# Altium PCB MYPCB.PcbDoc
Units mil, origin at the board's own origin, x right, y up, seen from the top; angles counter-clockwise.
Board outline 6000 x 4000 mil, 2 copper layers (Top Layer, Bottom Layer); 56 components, 75 nets, 228 pads, 42 vias.
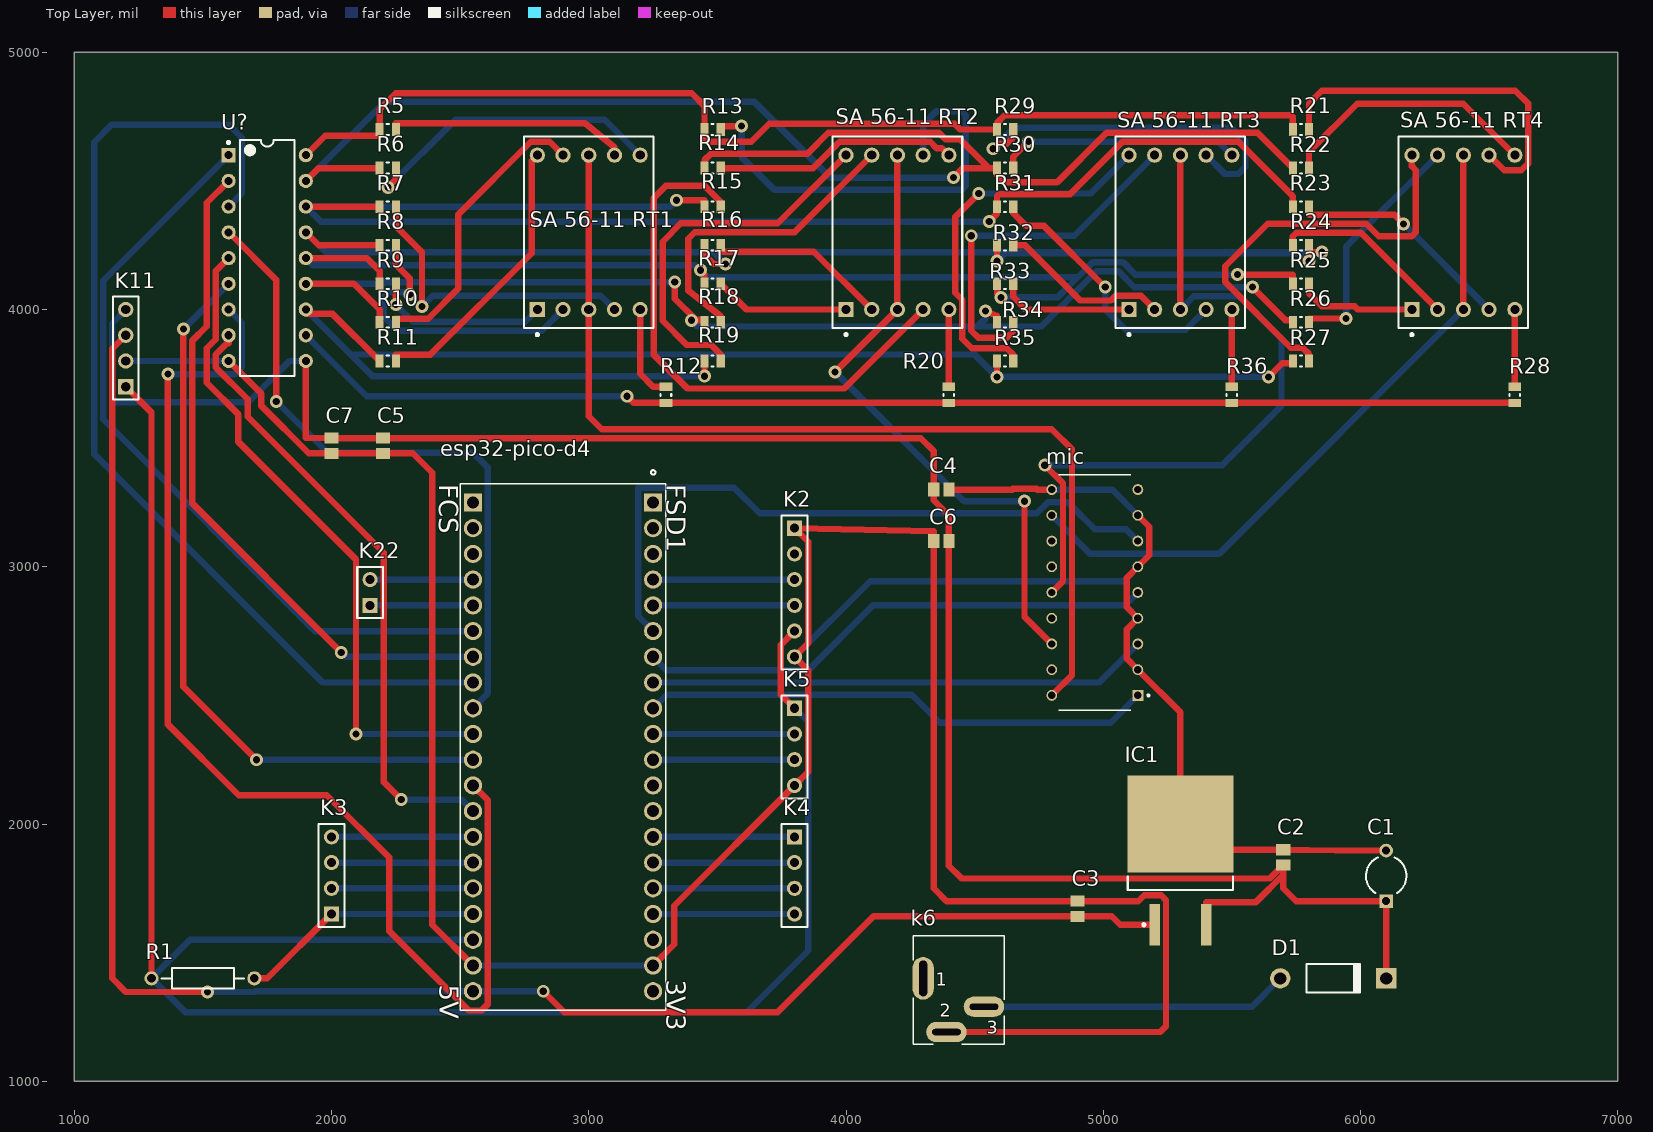
[diagram p0: Top Layer view]
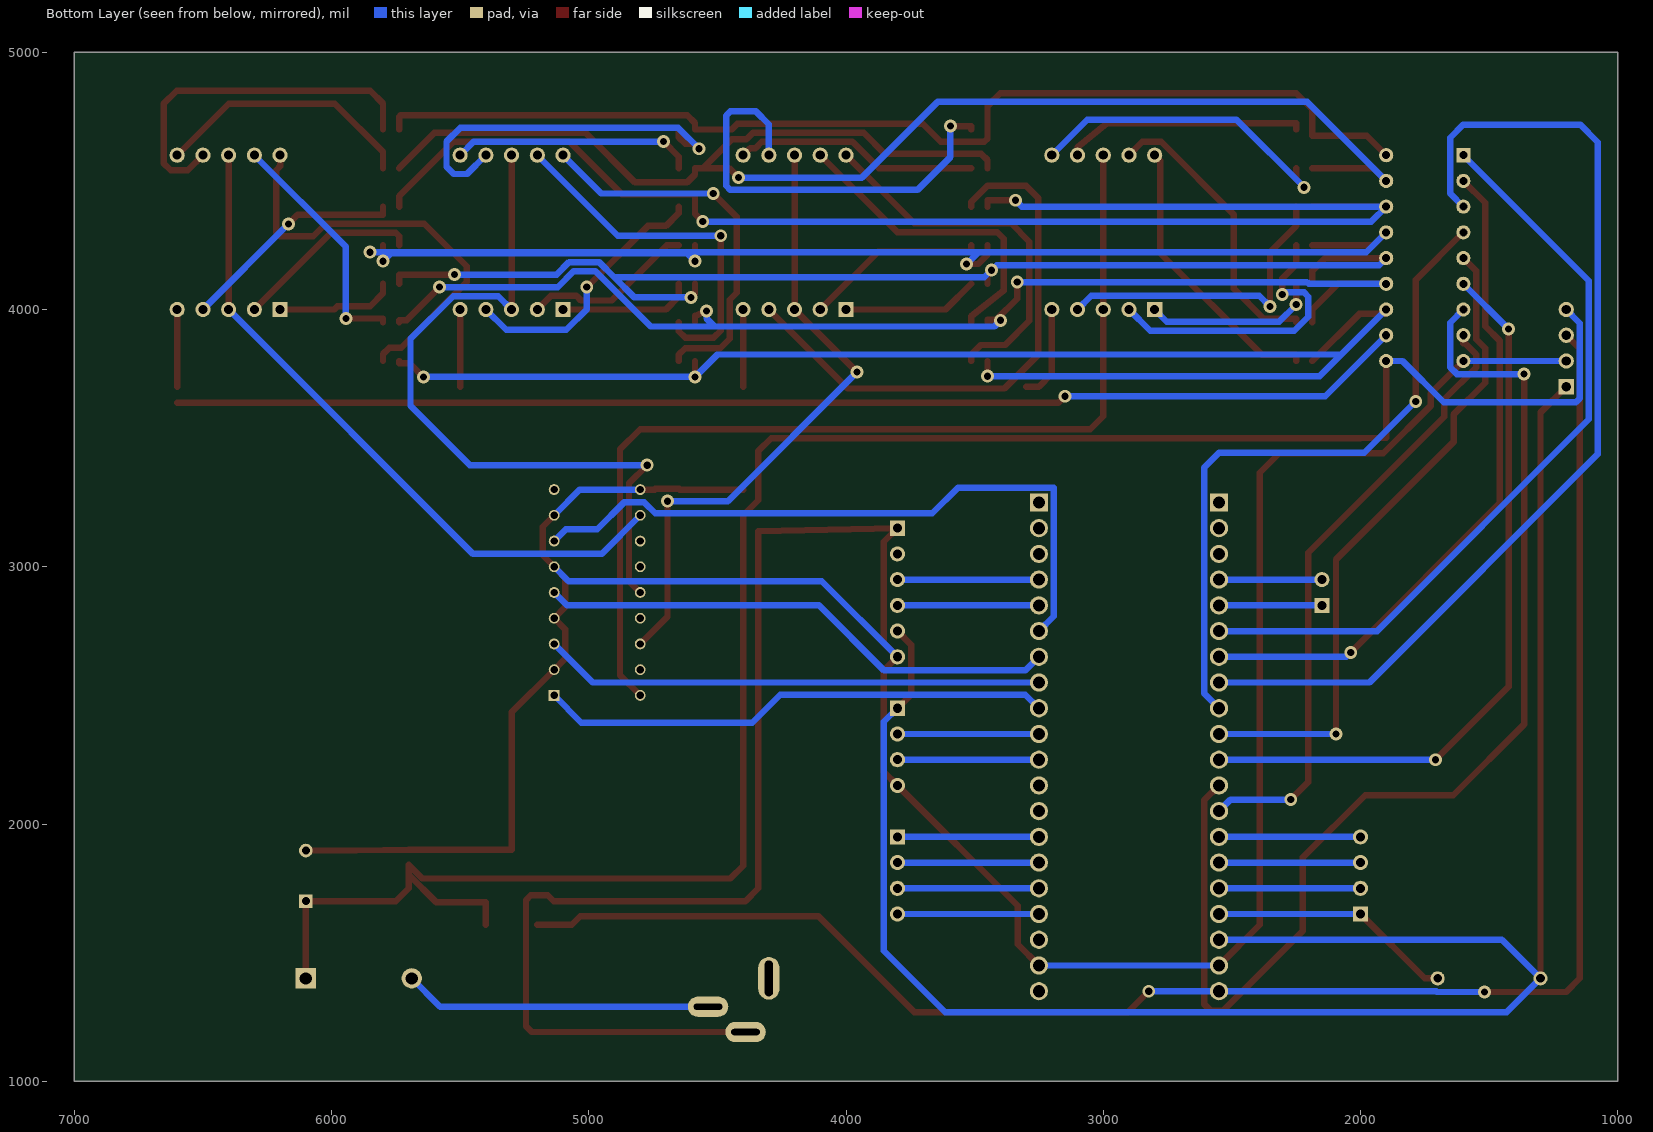
[diagram p1: Bottom Layer view, seen from below]

## Layer stack, top to bottom
Top Solder: solder mask 0.4, Solder Resist, Dk 3.5
Top Layer: signal copper 1.4
Dielectric 1: dielectric 12.6, FR-4, Dk 4.8
Bottom Layer: signal copper 1.4
Bottom Solder: solder mask 0.4, Solder Resist, Dk 3.5

## Board outline
1000,1000 7000,1000 7000,5000 1000,5000

## Design rules (kind name [scope] priority, off if disabled: settings)
Clearance [All] p1: gap=10 ignorepadtopadclearanceinfootprint=FALSE except(0: Arc-Hole Track-Hole SMDPad-Hole THPad-Hole Via-Hole Fill-Hole Poly-Hole Region-Hole Text-Hole)
PolygonConnect [All] p1: connectstyle=Relief reliefconductorwidth=10 reliefentries=4 polygonreliefangle="90 Angle" airgapwidth=10
RoutingVias [All] p1: holewidth=28 width=50 viastyle="Through Hole" minholewidth=28 minwidth=50 maxholewidth=28 maxwidth=50
SolderMaskExpansion [All] p1: expansion=4 istentingtop=FALSE
Width [All] p1: maxlimit=50 minlimit=15 preferedwidth=25 minimp=50.000000 maximp=50.000000 favimp=50.000000
30 further rules are at their usual default settings.

## Components (designator, comment, footprint, x,y, rotation, side; value= is the part's Value field where it differs from the comment)
C1 "Cap Pol1" CAPR5-4X5 6100,1798.42 r90 top value=100μF
C2 "Cap Pol3" C0805 5700,1870.47 r90 top value=330nF
C3 "Cap Pol3" C0805 4900,1670.47 r90 top value=100nF
C4 "Cap Pol3" C0805 4370.47,3300 r0 top value=1μF
C5 "Cap Pol3" C0805 2200,3470.47 r270 top value=1μ
C6 "Cap Pol3" C0805 4370.47,3100 r180 top value=100nF
C7 "Cap Pol3" C0805 2000,3470.47 r270 top value=100nF
D1 "Diode" DO-41 5894.09,1400 r0 top
esp32-pico-d4 "esp32-pico-d4" esp32picod4 2880,2305 r270 top
IC1 "L7805CD2T-TR" TO-263_M 5300,1858.27 r90 top
K2 "Header 6" HDR1X6 3800,3150 r270 top
K3 "Header 4" HDR1X4 2000,1650 r90 top
K4 "Header 4" HDR1X4 3800,1950 r270 top
K5 "Header 4" HDR1X4 3800,2450 r270 top
k6 "k6" k6 4442.8,1355 r0 top
K11 "Header 4" HDR1X4 1200,3700 r90 top
K22 "Header 2" HDR1X2 2150,2850 r90 top
mic "MIC2981" MIC2981 4964.65,2915 r180 top
R1 "Res2" AXIAL-0.4 1500,1400 r0 top value=1K
R5 "Res2" smd43 2218.5,4700 r0 top value=43Ω
R6 "Res2" smd43 2218.5,4550 r0 top value=43Ω
R7 "Res2" smd43 2218.5,4400 r0 top value=43Ω
R8 "Res2" smd43 2218.5,4250 r0 top value=43Ω
R9 "Res2" smd43 2218.5,4100 r0 top value=43Ω
R10 "Res2" smd43 2218.5,3950 r0 top value=43Ω
R11 "Res2" smd43 2218.5,3800 r0 top value=43Ω
R12 "Res2" smd43 3300,3668.5 r90 top value=680Ω
R13 "Res2" smd43 3481.5,4700 r0 top value=43Ω
R14 "Res2" smd43 3481.5,4550 r0 top value=43Ω
R15 "Res2" smd43 3481.5,4400 r0 top value=43Ω
R16 "Res2" smd43 3481.5,4250 r0 top value=43Ω
R17 "Res2" smd43 3481.5,4100 r0 top value=43Ω
R18 "Res2" smd43 3481.5,3950 r0 top value=43Ω
R19 "Res2" smd43 3481.5,3800 r0 top value=43Ω
R20 "Res2" smd43 4400,3668.5 r90 top value=680Ω
R21 "Res2" smd43 5768.5,4700 r0 top value=43Ω
R22 "Res2" smd43 5768.5,4550 r0 top value=43Ω
R23 "Res2" smd43 5768.5,4400 r0 top value=43Ω
R24 "Res2" smd43 5768.5,4250 r180 top value=43Ω
R25 "Res2" smd43 5768.5,4100 r0 top value=43Ω
R26 "Res2" smd43 5768.5,3950 r0 top value=43Ω
R27 "Res2" smd43 5768.5,3800 r0 top value=43Ω
R28 "Res2" smd43 6600,3668.5 r90 top value=680Ω
R29 "Res2" smd43 4618.5,4700 r0 top value=43Ω
R30 "Res2" smd43 4618.5,4550 r0 top value=43Ω
R31 "Res2" smd43 4618.5,4400 r0 top value=43Ω
R32 "Res2" smd43 4618.5,4250 r0 top value=43Ω
R33 "Res2" smd43 4618.5,4100 r0 top value=43Ω
R34 "Res2" smd43 4618.5,3950 r0 top value=43Ω
R35 "Res2" smd43 4618.5,3800 r0 top value=43Ω
R36 "Res2" smd43 5500,3668.5 r90 top value=680Ω
"SA 56-11 RT1" "Dpy Blue-CA" H 3000,4300 r0 top
"SA 56-11 RT2" "Dpy Blue-CA" H 4200,4300 r0 top
"SA 56-11 RT3" "Dpy Blue-CA" H 5300,4300 r0 top
"SA 56-11 RT4" "Dpy Blue-CA" H 6400,4300 r0 top
U? "ULN2803A" STM-DIP-18 1750,4200 r0 top

## Footprints (in the part's own frame and the unit in brackets; to place one, negate y for a bottom-side part, rotate by r counter-clockwise, add the part's x,y. Pads: shape width x height; smd on the part's side, far side on the other; paste and mask are expansions set on the pad)
AXIAL-0.4 [mm] "Axial Device, Thru-Hole; 2 Leads; 0.4 in Pin Spacing"
  round 1.4 hole 0.85: 1(-5.08,0) 2(5.08,0)
  silkscreen extent -4.06,-1.02 4.06,1.02
C0805 [mm] "Chip Capacitor, Body 2.0x1.3mm, IPC High Density"
  rect 1.1x1.4 smd: 1(-0.75,0) 2(0.75,0)
  body extent -1.1,-0.72 1.1,0.72, height 1.4
CAPR5-4X5 [mm] "Capacitor; 2 Leads"
  rect 1.35x1.35 hole 0.8: 1(-2.5,0)
  round 1.35 hole 0.8: 2(2.5,0)
  silkscreen extent -1.69,-2 1.82,2
DO-41 [mm] "Diode, Axial; Body 5.2 x 2.7 mm (LxDia. max), Lead Dia. 0.86 mm (max)"
  round 2 hole 1.2: 1(-5.23,0)
  rect 2x2 hole 1.2: 2(5.23,0)
  silkscreen extent -2.65,-1.4 2.75,1.4
esp32picod4 [mm]
  rect 1.8x1.8 hole 1.2: 1(-24.003,-8.382) 40(-24.003,9.398)
  round 1.8 hole 1.2: 2(-21.463,-8.382) 3(-18.923,-8.382) 4(-16.383,-8.382) 5(-13.843,-8.382) 6(-11.303,-8.382) 7(-8.763,-8.382) 8(-6.223,-8.382) 9(-3.683,-8.382) 10(-1.143,-8.382) 11(1.397,-8.382) 12(3.937,-8.382) 13(6.477,-8.382) 14(9.017,-8.382) 15(11.557,-8.382) 16(14.097,-8.382) 17(16.637,-8.382) 18(19.177,-8.382) 19(21.717,-8.382) 20(24.257,-8.382) 21(24.257,9.398) 22(21.717,9.398) 23(19.177,9.398) 24(16.637,9.398) 25(14.097,9.398) 26(11.557,9.398) 27(9.017,9.398) 28(6.477,9.398) 29(3.937,9.398) 30(1.397,9.398) 31(-1.143,9.398) 32(-3.683,9.398) 33(-6.223,9.398) 34(-8.763,9.398) 35(-11.303,9.398) 36(-13.843,9.398) 37(-16.383,9.398) 38(-18.923,9.398) 39(-21.463,9.398)
  silkscreen extent -27.2,-9.64 26.13,10.66
H [mm] "LED, 7-Segment Display, 14.2 mm, RHD; 10 Leads; Row Space 15.24 mm; Pitch 2.54 mm"
  rect 1.5x1.5 hole 0.9: 1(-5.08,-7.62)
  round 1.5 hole 0.9: 2(-2.54,-7.62) 3(0,-7.62) 4(2.54,-7.62) 5(5.08,-7.62) 6(5.08,7.62) 7(2.54,7.62) 8(0,7.62) 9(-2.54,7.62) 10(-5.08,7.62)
  silkscreen extent -6.4,-10.22 6.4,9.45, body extent -6.4,-9.45 6.4,9.45, height 8.25
HDR1X2 [mm] "Connector; Header; 2 Position"
  rect 1.5x1.5 hole 0.9: 1(0,0)
  round 1.5 hole 0.9: 2(2.54,0)
  silkscreen extent -1.27,-1.27 3.81,1.27
HDR1X4 [mm] "Connector; Header; 4 Position"
  rect 1.5x1.5 hole 0.9: 1(0,0)
  round 1.5 hole 0.9: 2(2.54,0) 3(5.08,0) 4(7.62,0)
  silkscreen extent -1.27,-1.27 8.89,1.27
HDR1X6 [mm] "Connector; Header; 6 Position"
  rect 1.5x1.5 hole 0.9: 1(0,0)
  round 1.5 hole 0.9: 2(2.54,0) 3(5.08,0) 4(7.62,0) 5(10.16,0) 6(12.7,0)
  silkscreen extent -1.27,-1.27 13.97,1.27
k6 [mm]
  oval 2.1x4.2 hole 0.8 slot 3.52 at 90 deg: 1(-3.627,1.143)
  oval 4x2 hole 0.6 slot 2.82 at 0 deg: 2(-1.327,-4.157) 3(2.373,-1.657)
  silkscreen extent -4.63,-5.36 4.37,5.34
MIC2981 [mm]
  rect 1.07x1.07 hole 0.72: 1(-4.318,10.541)
  round 1.07 hole 0.72: 2(-4.318,8.001) 3(-4.318,5.461) 4(-4.318,2.921) 5(-4.318,0.381) 6(-4.318,-2.159) 7(-4.318,-4.699) 8(-4.318,-7.239) 9(-4.318,-9.779) 10(4.182,-9.779) 11(4.182,-7.239) 12(4.182,-4.699) 13(4.182,-2.159) 14(4.182,0.381) 15(4.182,2.921) 16(4.182,5.461) 17(4.182,8.001) 18(4.182,10.541)
  silkscreen extent -5.45,-11.24 3.48,12
smd43 [mm]
  rect 0.8x1.25 smd: 1(-0.8,0) 2(0.8,0)
  silkscreen extent -0.1,-0.53 0.1,0.53, body extent -1.05,-0.67 1.05,0.67, height 0.6
STM-DIP-18 [mm] "DIP, 18-Leads, Body 23.25x7.1mm, Pitch 2.54mm"
  rect 1.4x1.4 hole 0.8: 1(-3.81,10.16)
  round 1.4 hole 0.8: 2(-3.81,7.62) 3(-3.81,5.08) 4(-3.81,2.54) 5(-3.81,0) 6(-3.81,-2.54) 7(-3.81,-5.08) 8(-3.81,-7.62) 9(-3.81,-10.16) 10(3.81,-10.16) 11(3.81,-7.62) 12(3.81,-5.08) 13(3.81,-2.54) 14(3.81,0) 15(3.81,2.54) 16(3.81,5.08) 17(3.81,7.62) 18(3.81,10.16)
  silkscreen extent -3.93,-11.65 2.7,11.65, body extent -3.93,-11.63 3.93,11.63, height 3.93
TO-263_M [mm] "D2-PAK, 4-Leads, Body 9.2x10.2mm, Pitch 2.54mm, Lead Span 15.4mm, IPC Low Density"
  rect 4.1x1.05 smd: 1(-6.35,2.54) 3(-6.35,-2.54)
  rect 9.6x10.45 smd: 4(3.6,0)
  silkscreen extent -6.47,-5.2 -1.6,5.2, body extent -2.9,-5.2 6.45,5.2, height 4.6

## Part data
C1: "Polarized Capacitor (Radial)", LatestRevisionDate=17-Jul-2002, LatestRevisionNote="Re-released for DXP Platform.", PackageDescription="Polarized Capacitor (Radial); 2 Leads", PackageReference=RB7.6-15, Published=8-Jun-2000, Publisher="Altium Limited"
C2 C3 C4 C5 C6 C7: "Polarized Capacitor (Surface Mount)", LatestRevisionDate=29-May-2009, LatestRevisionNote="IPC-7351 Footprint Added.", PackageDescription="Chip Capacitor", PackageReference=C0805, Published=8-Jun-2000, Publisher="Altium Limited"
D1: library part "Diode 1N4002", "1 Amp General Purpose Rectifier", Code_JEDEC=DO-204-AL, ComponentLink1Description="Manufacturer Link", ComponentLink1URL=http://www.fairchildsemi.com/, ComponentLink2Description=Datasheet, ComponentLink2URL=http://www.fairchildsemi.com/ds/1N%2F1N4001.pdf, DatasheetVersion=1998, LatestRevisionDate=17-Jul-2002, LatestRevisionNote="Re-released for DXP Platform.", PackageDescription="Diode, Axial; Body 5.2 x 2.7 mm (LxDia. max), Lead Dia. 0.86 mm (max)", PackageReference=DO-41, PackageVersion=Aug-1999, Published=8-Jun-2000, Publisher="Altium Limited"
esp32-pico-d4: library part "picoESP32-PICO-KIT V"
IC1: library part CMP-0244-00213-1, "Positive Voltage Regulator, 3-Pin D2PAK, Tape and Reel", ComponentLink1Description="Manufacturer URL", ComponentLink1URL=http://www.st.com, ComponentLink2Description=Datasheet, ComponentLink2URL=http://www.st.com/internet/com/TECHNICAL_RESOURCES/TECHNICAL_LITERATURE/DATASHEET/CD00000444.pdf, DatasheetVersion=16/11/2011, PackageDescription="3-Pin Transistor Outline Package 2.54 mm Pitch, 15.4 mm Lead Span (D2PAK)", PackageReference=TO-263, PackageVersion=2011
K2: "Header, 6-Pin", LatestRevisionDate=17-Jul-2002, LatestRevisionNote="Re-released for DXP Platform.", Publisher="Altium Limited"
K3 K4 K5 K11: "Header, 4-Pin", LatestRevisionDate=17-Jul-2002, LatestRevisionNote="Re-released for DXP Platform.", Publisher="Altium Limited"
K22: "Header, 2-Pin", LatestRevisionDate=17-Jul-2002, LatestRevisionNote="Re-released for DXP Platform.", Publisher="Altium Limited"
R1 R5 R6 R7 R8 R9 R10 R11 R12 R13 R14 R15 R16 R17 R18 R19 R20 R21 R22 R23 R24 R25 R26 R27 R28 R29 R30 R31 R32 R33 R34 R35 R36: "Resistor", LatestRevisionDate=17-Jul-2002, LatestRevisionNote="Re-released for DXP Platform.", PackageDescription="Axial Device, Thru-Hole; 2 Leads; 0.4 in Pin Spacing", PackageReference=AXIAL-0.4, Published=8-Jun-2000, Publisher="Altium Limited"
"SA 56-11 RT1": "14.2 mm General Purpose Blue 7-Segment Display: CA, RH DP, Gray Surface", Colour=Blue, ComponentLink1Description="Manufacturer Link", ComponentLink1URL=http://www.agilent.com/, DatasheetVersion=24-Sep-2002, LatestRevisionDate=17-Dec-2003, LatestRevisionNote="Schematic revised, PCB Footprint replaced.", MinimumIntensity="2020 ucd", Note="IF = 10 mA", PackageDescription="LED, 7-Segment Display, 14.2 mm, RHD; 10 Leads; Row Space 15.24 mm; Pitch 2.54 mm", PackageReference=H, PackageVersion=24-Sep-2002, Published=8-Jun-2000, Publisher="Altium Limited"
"SA 56-11 RT2" "SA 56-11 RT3" "SA 56-11 RT4": "14.2 mm General Purpose Blue 7-Segment Display: CA, RH DP, Gray Surface", Colour=red, ComponentLink1Description="Manufacturer Link", ComponentLink1URL=http://www.agilent.com/, DatasheetVersion=24-Sep-2002, LatestRevisionDate=17-Dec-2003, LatestRevisionNote="Schematic revised, PCB Footprint replaced.", MinimumIntensity="2020 ucd", Note="IF = 10 mA", PackageDescription="LED, 7-Segment Display, 14.2 mm, RHD; 10 Leads; Row Space 15.24 mm; Pitch 2.54 mm", PackageReference=H, PackageVersion=24-Sep-2002, Published=8-Jun-2000, Publisher="Altium Limited"
U?: library part CMP-2000-05363-1, "Eight Darlington Arrays, 50 V, 2.25 W, 500 mA, 18-Pin DIP, RoHS, Tube", Collector Emitter Voltage V(br)ceo=50V, DC Collector Current=500mA, DC Current Gain hFE=1000hFE, Manufacturer=STMicroelectronics, Operating Temperature Max=85degC, Package Description="18-Pin Double In-line Package, Body 24.8 x 7.1 mm, Pitch 2.54 mm", Package Reference=DIP-18, Power Dissipation Pd=2.25W, Transistor Case Style=DIP, Automotive Qualification Standard=-, Datasheet URL=https://datasheet.ciiva.com/29306/171824-da-01-en-ic-uln2803-dil18-29306026.pdf, Datasheet Version=Sep-03, Manufacturer URL=http://www.st.com/, MSL=-, No. of Pins=18Pins, Product Range=-, SVHC=NoSVHC(17-Dec-2015), Transistor Polarity=NPN

## Via types
v1: diameter 50, hole 28, Top Layer to Bottom Layer, 42 vias

## Nets (pads, with @x,y where several pads share a name; then routed paths per layer and width w, separated by ;. In a path a pad name is that pad's centre, name@x,y a point inside that pad or via, vN(x,y) a via of type N, cw(c..) or ccw(c..) an arc to the next point about the centre after c; other vN are vias at no path point)
+3.3: esp32-pico-d4.18 K2.5 K5.1 K11.1 R1.1 | length 7669.1
  Top Layer w25: K11.1 1300,3600 R1.1 ; K5.1 3747,2503 3747,2697 K2.5
  Bottom Layer w25: esp32-pico-d4.18 1450,1550 R1.1 1432,1268 3614,1268 3853,1507 3853,2397 K5.1
+5: C3.1 esp32-pico-d4.20 IC1.1 K11.3 | length 6800.1
  Top Layer w25: K11.3 1147,3847 1147,1400 1200,1347 v1(1518,1347) ; v1(2823,1350) 2905,1268 3734,1268 4106.94,1640.94 C3.1 5033,1640.94 5065.68,1608.27 IC1.1
  Bottom Layer w25: v1(1518,1347) 1703,1347 1706,1350 esp32-pico-d4.20 v1(2823,1350)
+12: C1.1 C2.1 C4.1 C5.1 C6.1 C7.1 D1.2 IC1.3 K11.4 U?.10 | length 8176.3
  Top Layer w25: U?.10 1900,3502 C7.1 C5.1 4290.94,3500 4340.94,3450 C4.1 4340.94,3259.06 4400,3200 C6.1 4400,1838 4450,1788 5647.06,1788 C2.1 5700,1803 ; IC1.3 5400,1696.5 5593.5,1696.5 5700,1803 ; D1.2 C1.1 5750,1700 5700,1750 5700,1803
  Bottom Layer w25: K11.4 1147,3947 1147,3654.5 1162.5,3639 1675.67,3639 1836.67,3800 U?.10
+VIN: D1.1 k6.3 | length 1197.6
  Bottom Layer w25: k6.3 5577.95,1289.76 D1.1
GND: C1.2 C2.2 C3.2 C4.2 C5.2 C6.2 C7.2 esp32-pico-d4.19 esp32-pico-d4.22 IC1.4 K2.1 K2.6 K5.4 k6.2 K11.2 mic.2 mic.4 mic.6 mic.8 mic.10 U?.9 | length 14854
  Top Layer w25: U?.9 1727.4,3672.6 1727.4,3625 1911.45,3440.94 C7.2 C5.2 2316,3440.94 2392,3364.94 2392,1608 esp32-pico-d4.19 ; esp32-pico-d4.22 3332,1532 3332,1682 K5.4 3853,2203 3853,2597 K2.6 3853,2703 3853,3097 K2.1 4340.94,3137.5 C6.2 4340.94,1750 4390.94,1700 C3.2 5136,1700 5159,1723 5225,1723 5244,1704 5244,1214 5221.34,1191.34 k6.2 ; C4.2 4646.5,3300 4649,3302.5 4741.19,3302.5 4743.69,3300 mic.10 ; mic.8 5179,3155.65 5179,3044.35 mic.6 5091,2956.35 5091,2843.65 mic.4 5091,2756.35 5091,2643.65 mic.2 5300,2434.65 IC1.4 5300,1900 C2.2 5903.15,1896.85 C1.2
  Bottom Layer w25: K11.2 U?.9 ; esp32-pico-d4.19 esp32-pico-d4.22 ; K2.6 4094,2944 5078.65,2944 mic.6 ; mic.10 5034.65,3300 mic.8
I1: esp32-pico-d4.6 U?.1 | length 3008
  Bottom Layer w25: U?.1 1112,4112 1112,3573 1935,2750 esp32-pico-d4.6
I2: esp32-pico-d4.7 U?.2 | length 2650.1
  Top Layer w25: U?.2 1514.94,4414.94 1514.94,3935 1459.26,3879.32 1459.26,3245.74 v1(2038,2667)
  Bottom Layer w25: v1(2038,2667) 2055,2650 esp32-pico-d4.7
I3: esp32-pico-d4.8 U?.3 | length 3965.7
  Bottom Layer w25: U?.3 1651,4451 1651,4668 1600,4719 1146,4719 1077,4650 1077,3438 1965,2550 esp32-pico-d4.8
I4: esp32-pico-d4.9 U?.4 | length 2622.5
  Top Layer w25: U?.4 1785,4115 v1(1785,3643)
  Bottom Layer w25: v1(1785,3643) 1985,3443 2550,3443 2608,3385 2608,2508 esp32-pico-d4.9
I5: esp32-pico-d4.10 U?.5 | length 2580.5
  Top Layer w25: U?.5 1549.94,4149.94 1549.94,3885.06 1514.94,3850.06 1514.94,3714.94 1638,3591.88 1638,3485 2095,3028 v1(2095,2350)
  Bottom Layer w25: v1(2095,2350) esp32-pico-d4.10
I6: esp32-pico-d4.11 U?.6 | length 2882.3
  Top Layer w25: v1(1424.26,3924.26) 1424.26,2533.74 v1(1708,2250)
  Bottom Layer w25: v1(1424.26,3924.26) U?.6 ; v1(1708,2250) esp32-pico-d4.11
I7: esp32-pico-d4.12 U?.7 | length 4662.4
  Top Layer w25: v1(1364,3749) 1364,2387 1639,2112 1982,2112 2224,1870 2224,1584 2533,1275 2583,1275 2608,1300 2608,2092 esp32-pico-d4.12
  Bottom Layer w25: v1(1364,3749) 1625,3749 1651,3775 1651,3949 U?.7
I8: esp32-pico-d4.13 U?.8 | length 2425.6
  Top Layer w25: U?.8 1600,3869 1593.94,3869 1549.94,3825 1549.94,3775 1674,3650.94 1674,3583 2203,3054 2203,2163 v1(2271,2095)
  Bottom Layer w25: v1(2271,2095) 2505,2095 esp32-pico-d4.13
Netesp32-pico-d4_4: esp32-pico-d4.4 K22.2 | length 400
  Bottom Layer w25: K22.2 esp32-pico-d4.4
Netesp32-pico-d4_5: esp32-pico-d4.5 K22.1 | length 400
  Bottom Layer w25: K22.1 esp32-pico-d4.5
Netesp32-pico-d4_14: esp32-pico-d4.14 K3.4 | length 550
  Bottom Layer w25: K3.4 esp32-pico-d4.14
Netesp32-pico-d4_15: esp32-pico-d4.15 K3.3 | length 550
  Bottom Layer w25: K3.3 esp32-pico-d4.15
Netesp32-pico-d4_16: esp32-pico-d4.16 K3.2 | length 550
  Bottom Layer w25: K3.2 esp32-pico-d4.16
Netesp32-pico-d4_17: esp32-pico-d4.17 K3.1 R1.2 | length 953.6
  Top Layer w25: R1.2 1750,1400 K3.1
  Bottom Layer w25: K3.1 esp32-pico-d4.17
Netesp32-pico-d4_24: esp32-pico-d4.24 K4.4 | length 550
  Bottom Layer w25: esp32-pico-d4.24 K4.4
Netesp32-pico-d4_25: esp32-pico-d4.25 K4.3 | length 550
  Bottom Layer w25: esp32-pico-d4.25 K4.3
Netesp32-pico-d4_26: esp32-pico-d4.26 K4.2 | length 550
  Bottom Layer w25: esp32-pico-d4.26 K4.2
Netesp32-pico-d4_27: esp32-pico-d4.27 K4.1 | length 550
  Bottom Layer w25: esp32-pico-d4.27 K4.1
Netesp32-pico-d4_30: esp32-pico-d4.30 K5.3 | length 550
  Bottom Layer w25: esp32-pico-d4.30 K5.3
Netesp32-pico-d4_31: esp32-pico-d4.31 K5.2 | length 550
  Bottom Layer w25: esp32-pico-d4.31 K5.2
Netesp32-pico-d4_32: esp32-pico-d4.32 mic.1 | length 1995.7
  Bottom Layer w25: esp32-pico-d4.32 3303,2503 4256,2503 4365,2394 5028.65,2394 mic.1
Netesp32-pico-d4_33: esp32-pico-d4.33 mic.3 | length 1946.8
  Bottom Layer w25: esp32-pico-d4.33 4984.65,2550 mic.3
Netesp32-pico-d4_34: esp32-pico-d4.34 mic.5 | length 2032.1
  Bottom Layer w25: esp32-pico-d4.34 3303,2597 3852,2597 4105,2850 5084.65,2850 mic.5
Netesp32-pico-d4_35: esp32-pico-d4.35 mic.7 | length 2646.1
  Bottom Layer w25: esp32-pico-d4.35 3192,2808 3192,3308 3564,3308 3664.55,3207.45 4741.5,3207.45 4784.05,3250 4863,3250 4967,3146 5088.65,3146 mic.7
Netesp32-pico-d4_36: esp32-pico-d4.36 K2.4 | length 550
  Bottom Layer w25: esp32-pico-d4.36 K2.4
Netesp32-pico-d4_37: esp32-pico-d4.37 K2.3 | length 550
  Bottom Layer w25: esp32-pico-d4.37 K2.3
Netmic_11: "SA 56-11 RT4.3" "SA 56-11 RT4.8" mic.11 | length 2655.6
  Top Layer w25: 6400,4000 6400,4600
  Bottom Layer w25: mic.11 4950,3050 5450,3050 6400,4000
Netmic_14: "SA 56-11 RT3.3" "SA 56-11 RT3.8" mic.14 | length 2901.3
  Top Layer w25: v1(4773,3395) 4843.56,3324.44 4843.56,2943.56 mic.14 ; 5300,4000 5300,4600
  Bottom Layer w25: v1(4773,3395) 5462,3395 5693,3626 5693,3886 5526.97,4052.03 5352.03,4052.03 5300,4000
Netmic_16: "SA 56-11 RT2.3" "SA 56-11 RT2.8" mic.16 | length 2487.5
  Top Layer w25: v1(3957,3757) 4200,4000 4200,4600 ; v1(4694,3255) 4694,2806 mic.16
  Bottom Layer w25: v1(3957,3757) 4459,3255 v1(4694,3255)
Netmic_18: "SA 56-11 RT1.3" "SA 56-11 RT1.8" mic.18 | length 3935.8
  Top Layer w25: 3000,4600 3000,4000 3000,3585 3050,3535 4800,3535 4878.56,3456.44 4878.56,2578.56 mic.18
O1: R5.1 R13.1 R21.1 R29.1 U?.18 | length 4277.2
  Top Layer w25: U?.18 1975,4675 2187.01,4675 R5.1 2187.01,4778.01 2250,4841 3400,4841 3450,4791 R13.1 3450,4664.5 3462.5,4652 3631.79,4652 3701.82,4722.03 4422.03,4722.03 4444.06,4700 R29.1 4587.01,4725 4617.02,4755.01 5732,4755.01 5737.01,4750 R21.1
O2: R6.1 R14.1 R22.1 R30.1 U?.17 | length 5820.2
  Top Layer w25: U?.17 1950,4550 R6.1 ; R14.1 3450,4581 3475,4606 3850,4606 3931.03,4687.03 4361.5,4687.03 4387.03,4661.5 4443.5,4661.5 4555,4550 ; v1(4418,4513) 4455,4550 4555,4550 ; R22.1 5599.98,4687.03 5012.97,4687.03 4819.94,4494 4618.01,4494 4587.01,4525 R30.1 4555,4550
  Bottom Layer w25: U?.17 2207,4807 3644,4807 3938,4513 v1(4418,4513)
O3: R7.1 R15.1 R23.1 R31.1 U?.16 | length 6030
  Top Layer w25: U?.16 R7.1 ; v1(3341,4425) 3450,4425 R15.1 ; v1(4556.88,4342) 4587.01,4372.13 R31.1 4587.01,4440 4595.01,4448 4870.97,4448 5075,4652.03 5525.97,4652.03 5737.01,4440.99 R23.1
  Bottom Layer w25: v1(3341,4425) 3316,4400 U?.16 1958,4342 v1(4556.88,4342)
O4: R8.1 R16.1 R24.1 R32.1 U?.15 | length 5902.7
  Top Layer w25: U?.15 1950,4250 R8.1 ; R16.1 3450,4213 3486,4177 v1(3531,4177) ; v1(4587.01,4188) R32.1 ; v1(5800,4188) 5800,4223 ; R24.1 5800,4223 ; v1(5851,4223) 5800,4223
  Bottom Layer w25: U?.15 1977,4223 3485,4223 ; v1(3531,4177) 3485,4223 ; v1(4587.01,4188) 4618.51,4219.5 5768.5,4219.5 v1(5800,4188) ; v1(5851,4223) 3485,4223
O5: R9.1 R17.1 R25.1 R33.1 U?.14 | length 4756.2
  Top Layer w25: U?.14 2137.01,4200 2187.01,4150 R9.1 ; v1(3434,4153) 3450,4137 R17.1 ; R33.1 4587.01,4061.99 v1(4602,4047) ; v1(5522,4136) 5737.01,4136 R25.1
  Bottom Layer w25: U?.14 1927.5,4172.5 3414.5,4172.5 v1(3434,4153) 3462,4125 4900.5,4125 ; v1(4602,4047) 4822.5,4047 4900.5,4125 ; v1(5522,4136) 5125,4136 5076.5,4184.5 4960,4184.5 4900.5,4125
O6: R10.1 R18.1 R26.1 R34.1 U?.13 | length 4763.4
  Top Layer w25: U?.13 2087.01,4100 2187.01,4000 R10.1 ; v1(3334.53,4106.75) 3334.53,4042.22 3415.5,3961.25 3450,3961.25 R18.1@3450,3958 ; v1(3399,3958) R18.1@3450,3958 ; R18.1 R18.1@3450,3958 ; v1(4542,3994) 4587.01,3975 R34.1 ; v1(5579.97,4087.03) 5708,3959 5737.01,3959 R26.1
  Bottom Layer w25: U?.13 2201.25,4100 2208,4106.75 v1(3334.53,4106.75) ; v1(3399,3958) 3423,3934 4511,3934 ; v1(4542,3994) 4542,3965 4511,3934 ; v1(5579.97,4087.03) 5121.03,4087.03 5058.56,4149.5 4975,4149.5 4759.5,3934 4511,3934
O7: R11.1 R19.1 R27.1 R35.1 U?.12 | length 5887.4
  Top Layer w25: U?.12 1900,3983 2004.01,3983 R11.1 ; v1(3450,3741) R19.1 ; v1(4587.01,3738) R35.1 ; v1(5643,3738) 5696,3791 5737.01,3791 R27.1
  Bottom Layer w25: U?.12 2074.75,3825.25 ; v1(3450,3741) 2159,3741 2074.75,3825.25 ; v1(5643,3738) v1(4587.01,3738) 4499.75,3825.25 2074.75,3825.25
O8: R12.1 R20.1 R28.1 R36.1 U?.11 | length 4809.8
  Top Layer w25: v1(3149,3663) 3174.99,3637.01 R12.1 R20.1 4703.01,3637.01 4704,3638 5490.01,3638 5491,3637.01 R36.1 R28.1
  Bottom Layer w25: U?.11 2137,3663 v1(3149,3663)
R5: "SA 56-11 RT1.7" R5.2 | length 937.9
  Top Layer w25: R5.2 2250,4724 2985,4724 3100,4631 3100,4600
R6: "SA 56-11 RT1.6" R6.2 | length 1234.9
  Top Layer w25: v1(2219,4475) 2250,4506 R6.2
  Bottom Layer w25: v1(2219,4475) 2482,4738 3062,4738 3200,4600
R7: "SA 56-11 RT1.4" R7.2 | length 1217.7
  Top Layer w25: R7.2 2250,4325 2351.75,4223.25 v1(2351.75,4011.75)
  Bottom Layer w25: v1(2351.75,4011.75) 2393,4053 3047,4053 3100,4000
R8: "SA 56-11 RT1.2" R8.2 | length 1157.8
  Top Layer w25: R8.2 2250,4175 2304,4121 v1(2304,4059)
  Bottom Layer w25: v1(2304,4059) 2296.5,4066.5 2219,4066.5 2202.5,4050 2202.5,3971.5 2257,3917 2817,3917 2900,4000
R9: "SA 56-11 RT1.1" R9.2 | length 678.2
  Top Layer w25: v1(2250,4019) R9.2
  Bottom Layer w25: v1(2250,4019) 2316.5,3952.5 2752.5,3952.5 2800,4000
R10: "SA 56-11 RT1.9" R10.2 | length 1139.7
  Top Layer w25: R10.2 2250,3964 2375.75,3964 2492,4080.25 2492,4369.03 2775,4652.03 2847.97,4652.03 2900,4600
R11: "SA 56-11 RT1.10" R11.2 | length 1106.5
  Top Layer w25: R11.2 2250,3825 2384.25,3825 2778,4218.75 2778,4578 2800,4600
R12: "SA 56-11 RT1.5" R12.2 | length 370.7
  Top Layer w25: 3200,4000 3200,3750 3250,3700 R12.2
R13: "SA 56-11 RT2.7" R13.2 | length 1732
  Top Layer w25: R13.2 3512.99,4713 v1(3594,4713)
  Bottom Layer w25: v1(3594,4713) 3594,4593 3722,4465 4450,4465 4466,4481 4466,4754 4450,4770 4350,4770 4300,4720 4300,4600
R14: "SA 56-11 RT2.6" R14.2 | length 950.8
  Top Layer w25: R14.2 3872.97,4550 3975,4652.03 4326.97,4652.03 4352,4627 4373,4627 4400,4600
R15: "SA 56-11 RT2.4" R15.2 | length 2162.8
  Top Layer w25: R15.2 3512.99,4418.01 3450,4481 3300,4481 3252.03,4433.03 3252.03,3824.97 3384,3693 3993,3693 4300,4000
R16: "SA 56-11 RT2.2" R16.2 | length 705.2
  Top Layer w25: R16.2 3512.99,4225 3875,4225 4100,4000
R17: "SA 56-11 RT2.1" R17.2 | length 528.4
  Top Layer w25: R17.2 3612.99,4000 4000,4000
R18: "SA 56-11 RT2.9" R18.2 | length 1234.6
  Top Layer w25: R18.2 3512.99,3974.01 3386.5,4073.5 3386.5,4275 3411.5,4300 3800,4300 4100,4600
R19: "SA 56-11 RT2.10" R19.2 | length 1465.4
  Top Layer w25: R19.2 3512.99,3825 3475.99,3862 3381,3862 3287.03,3955.97 3287.03,4264.03 3358,4335 3735,4335 4000,4600
R20: "SA 56-11 RT2.5" R20.2 | length 300
  Top Layer w25: R20.2 4400,4000
R21: "SA 56-11 RT4.7" R21.2 | length 1415.9
  Top Layer w25: R21.2 5800,4801 5850,4851 6602,4851 6653,4800 6653,4569 6625,4541 6559,4541 6500,4600
R22: "SA 56-11 RT4.6" R22.2 | length 1023.3
  Top Layer w25: R22.2 5800,4613 5987,4800 6400,4800 6600,4600
R23: "SA 56-11 RT4.4" R23.2 | length 884.4
  Top Layer w25: R23.2 5800,4368 6132,4368 v1(6167,4333)
  Bottom Layer w25: v1(6167,4333) 6500,4000
R24: "SA 56-11 RT4.2" R24.2 | length 726.8
  Top Layer w25: R24.2 5737.01,4285.01 5750,4298 6002,4298 6300,4000
R25: "SA 56-11 RT4.1" R25.2 | length 463.1
  Top Layer w25: R25.2 5800,4062.92 5850,4012.92 5977,4012.92 5989.92,4000 6200,4000
R26: "SA 56-11 RT4.9" R26.2 | length 941.5
  Top Layer w25: R26.2 5800,3965 v1(5944,3965)
  Bottom Layer w25: v1(5944,3965) 5944,4244 6300,4600
R27: "SA 56-11 RT4.10" R27.2 | length 1671.6
  Top Layer w25: R27.2 5800,3827 5775,3852 5729,3852 5474,4107 5474,4168 5639,4333 6023,4333 6071,4285 6200,4285 6215,4300 6215,4542 6200,4557 6200,4600
R28: "SA 56-11 RT4.5" R28.2 | length 300
  Top Layer w25: R28.2 6600,4000
R29: "SA 56-11 RT3.7" R29.2 | length 1458.6
  Top Layer w25: v1(4571,4625) 4590,4644 4625,4644 4650,4669 R29.2
  Bottom Layer w25: v1(4571,4625) 4652,4706 5500,4706 5553,4653 5553,4555 5525,4527 5473,4527 5400,4600
R30: "SA 56-11 RT3.6" R30.2 | length 940.4
  Top Layer w25: R30.2 4650,4594 v1(4709,4653)
  Bottom Layer w25: v1(4709,4653) 5447,4653 5500,4600
R31: "SA 56-11 RT3.4" R31.2 | length 1046.8
  Top Layer w25: R31.2 4650,4375 4700,4325 4770.03,4325 v1(5008,4087.03)
  Bottom Layer w25: v1(5008,4087.03) 5008,4000 5087,3921 5321,3921 5400,4000
R32: "SA 56-11 RT3.2" R32.2 | length 668.5
  Top Layer w25: R32.2 4696,4250 4911,4035 5030,4035 5048,4053 5147,4053 5200,4000
R33: "SA 56-11 RT3.1" R33.2 | length 520.7
  Top Layer w25: R33.2 4650,4050 4700,4000 5100,4000
R34: "SA 56-11 RT3.9" R34.2 | length 1430.1
  Top Layer w25: v1(4487.03,4287) 4487.03,3918 4514.03,3891 4625,3891 4650,3916 R34.2
  Bottom Layer w25: v1(4487.03,4287) 4887,4287 5200,4600
R35: "SA 56-11 RT3.10" R35.2 | length 1507.3
  Top Layer w25: v1(4516,4451) 4425,4360 4425,4065 4452.03,4037.97 4452.03,3886.97 4489,3850 4625,3850 4650,3825 R35.2
  Bottom Layer w25: v1(4516,4451) 4951,4451 5100,4600
R36: "SA 56-11 RT3.5" R36.2 | length 300
  Top Layer w25: R36.2 5500,4000
pads on no net: esp32-pico-d4.1 esp32-pico-d4.2 esp32-pico-d4.3 esp32-pico-d4.21 esp32-pico-d4.23 esp32-pico-d4.28 esp32-pico-d4.29 esp32-pico-d4.38 esp32-pico-d4.39 esp32-pico-d4.40 K2.2 k6.1 mic.9 mic.12 mic.13 mic.15 mic.17

## Text inside footprints (layer, text, board x,y; h text height)
esp32-pico-d4: Top Overlay "3V3" at 3303.78,1394.48 h73.82 r270; Top Overlay "FSD1" at 3303.76,3320.53 h73.82 r270; Top Overlay "5V" at 2419.93,1374.55 h73.82 r270; Top Overlay "FCS" at 2419.57,3321.28 h73.82 r270
k6: Top Overlay "1" at 4349.21,1370.87 h50; Top Overlay "3" at 4547.24,1183.86 h50; Top Overlay "2" at 4364.17,1251.57 h50